# Altium PCB EEM_PWR_MOD_AC.pcbdoc (part 2 of 2)
Units mm, origin at the board's own origin, x right, y up, seen from the top; angles counter-clockwise.
Board outline 177.11 x 100.13 mm, 2 copper layers (Top Layer, Bottom Layer), stack 1.62 mm thick; 73 components, 37 nets, 173 pads, 46 vias.
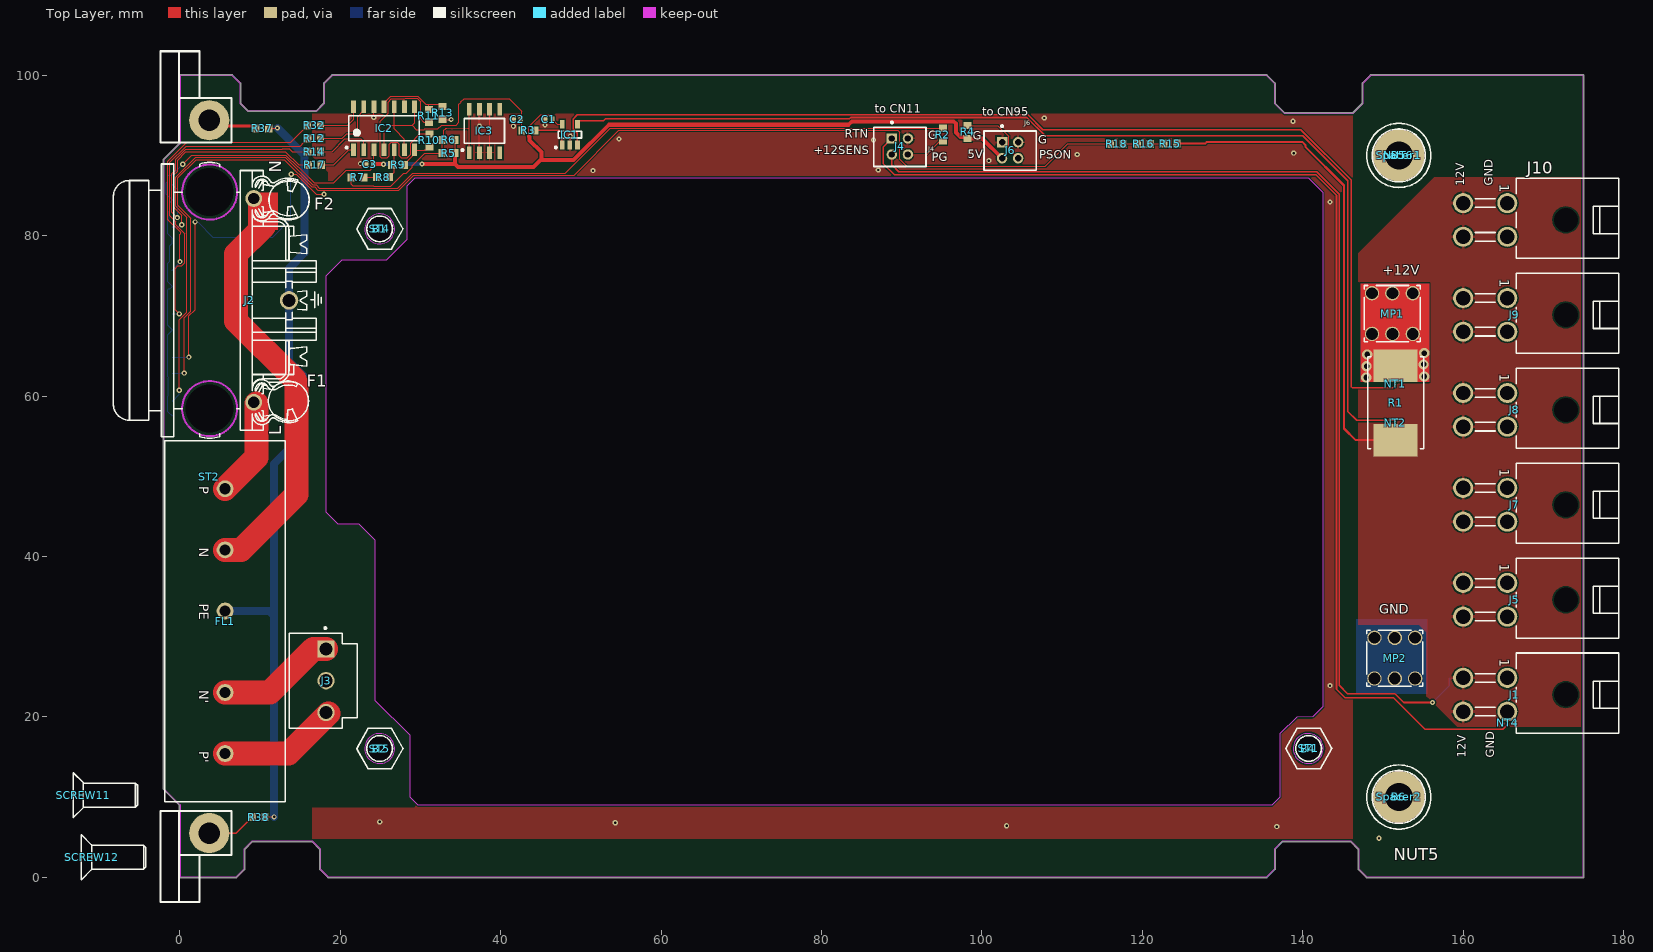
[diagram p0: Top Layer view]

## Keep-outs (continued)
Keep-Out Layer: (continued)
  lines w0.2: -2,11 -2,89.5 0,91.5 0,100 6.5,100 7.5,99 7.5,96.5 8.5,95.5 17,95.5 18,96.5 18,99 19,100 135.5,100 136.5,99 136.5,96.5 137.726,95.274 146.274,95.274 147.5,96.5 147.5,99 148.497,99.997 175,99.997 175,0 148,0 147,1 147,3.5 146,4.5 137.5,4.5 136.5,3.5 136.5,1 135.5,0 18.5,0 17.5,1 17.5,3.5 16.5,4.5 9,4.5 8,3.5 8,1 7,0 0,0 0,9 -2,11
  lines w0.254: 7.135,58.498 ccw(c3.7,58.436) 7.135,58.42 ; 7.135,85.498 ccw(c3.7,85.436) 7.135,85.42

## Other copper
Top Layer:
  rectangle net P12V0_SMPS: 151.498,61.671 151.625,61.825
  rectangle net RTN_Sense: 165.494,19.025 165.621,19.147
  rectangle net Imeas+: 151.498,61.253 151.625,61.493
  rectangle net Imeas-: 151.498,56.857 151.625,56.95
  rectangle net P12V0_SMPS: 147.193,61.747 155.804,74.066
  rectangle net NetFL1_N: 8.458,80.736 12.2,85.379
  pour cut-out: 16.688,89.738 18.491,87.935 18.491,49.987 26.289,42.189 26.289,22.885 30.302,18.872 30.302,9.804 29.185,8.687 0.178,8.687 -2.337,11.201 -2.337,89.408 -2.007,89.738
Bottom Layer:
  rectangle net P12V0: 158.656,24.701 159.002,24.828
  rectangle net P12V0_SMPS: 147.193,61.73 155.804,74.066
  rectangle net GND: 146.66,22.86 155.6,32.182
  pour cut-out: 16.43,33.829 21.602,33.829 23.133,32.298 23.133,17.867 21.926,16.659 14.289,16.659 13.678,17.271 13.678,32.298 13.804,32.298 13.678,32.298
  pour cut-out: 3.5,61.5 4.623,62.623 4.882,62.623 5.596,63.336 11.819,63.336 13.64,61.516 13.64,56.154 11.914,54.428 4.7,54.428 3.346,55.782
  pour cut-out: 2.576,88.835 13.878,88.835 14.554,88.159 14.554,82.123 11.73,79.299 3.649,79.299 2.023,80.925
  pour cut-out: 1.63,53.328 10.073,53.328 10.435,52.966 10.435,38.535 7.841,35.941 2.978,35.941 0.98,37.939 0.98,52.966 1.107,52.966 0.98,52.966
  pour cut-out: 1,27 9.443,27 9.805,26.638 9.805,12.207 8.598,11 0.961,11 0.35,11.611 0.35,26.638 0.476,26.638 0.35,26.638

## Silkscreen, mask and mechanical layers (free items; w line width, h text height)
Top Overlay:
  text "to CN11" at 86.639,94.971 h1.78
  text "to CN95" at 100.076,94.59 h1.78
  text "RTN" at 82.931,91.846 h1.78
  text "G" at 93.294,91.669 h1.78
  text "G" at 98.857,91.592 h1.78
  text "G" at 107.061,91.11 h1.78
  text "+12SENS" at 79.045,89.764 h1.78
  text "5V" at 98.222,89.306 h1.78
  text "PSON" at 107.137,89.205 h1.78
  text "PG" at 93.777,88.9 h1.78
  text "12V  /  / GND" at 164.085,86.258 h1.78 r90
  text "+12V" at 150.012,74.701 h2
  text "GND" at 149.553,32.436 h2
  text "12V  /  / GND" at 164.272,14.919 h1.78 r90
Bottom Paste:
  text ".Layer_Name" at 168.705,-40.005 h1.91
Mechanical 1:
  lines w0.1: 17,95.5 8.5,95.5 7.5,96.5 ; 17.5,96 18,96.5 18,99 19,100 135.5,100 136.5,99 136.5,96.5 137.726,95.274 146.274,95.274 147.5,96.5 147.5,99 148.5,100 160,100 160,100 ; 159.997,99.997 174.997,99.997 ; 175,100 175,0 160,0 148,0 147,1 147,3.5 146,4.5 137.5,4.5 136.5,3.5 136.5,1 135.5,0 18.5,0 17.5,1 17.5,3.5 16.5,4.5 9,4.5 8,3.5 8,1 7,0 0,0 0,9 -2,11 -2,89.5 0,91.5 0,100 6.5,100 7.5,99 7.5,96.5 ; 7.5,96.5 7.5,96.5
  lines w0.127: 7.5,99 6.5,100 0,100 0,91.5 -2,89.5 -2,11 0,9 0,0 7,0 8,1 8,3.5 9,4.5 16.5,4.5 17.5,3.5 17.5,1 18.5,0 135.5,0 136.5,1 136.5,3.5 137.5,4.5 146,4.5 147,3.5 147,1 148,0 160,0 ; 17,95.5 18,96.5 18,99 19,100 135.5,100 136.5,99 136.5,96.5 137.726,95.274 146.274,95.274 147.5,96.5 147.5,99 148.5,100 160,100
  lines w0.254: 134.995,87.2 140.693,87.2 142.5,85.393 142.5,21.25 141.25,20 139.25,20 137.166,17.916 137.166,10 136.166,9 29.701,9 28.701,10 28.701,17.672 24.366,22.008 24.366,42 22.366,44 19.766,44 18.266,45.5 18.266,75 20.266,77 25.78,77 28.366,79.586 28.366,86.2 29.366,87.2 136.166,87.2
Mechanical 2:
  circle w0.006: c10.557,-78.944 r0.003
  circle w0.013: c140.701,80.85 r1.75
  circle w0.013: c24.901,80.85 r1.75
  circle w0.013: c140.701,16.05 r1.75
  circle w0.013: c24.901,16.05 r1.75
  circle w0.013: c155.05,81.07 r0.5
  circle w0.013: c155.05,83.61 r0.5
  circle w0.013: c155.05,78.53 r0.5
  circle w0.013: c152.51,75.99 r0.5
  circle w0.013: c152.51,89.955 r2
  circle w0.013: c152.51,83.61 r0.5
  circle w0.013: c152.51,78.53 r0.5
  circle w0.013: c152.51,81.07 r0.5
  circle w0.013: c155.05,73.45 r0.5
  circle w0.013: c155.05,75.99 r0.5
  circle w0.013: c155.05,68.37 r0.5
  circle w0.013: c155.05,70.91 r0.5
  circle w0.013: c155.05,65.83 r0.5
  circle w0.013: c152.51,73.45 r0.5
  circle w0.013: c155.05,60.11 r0.5
  circle w0.013: c155.05,62.65 r0.5
  circle w0.013: c149.97,81.07 r0.5
  circle w0.013: c149.97,83.61 r0.5
  circle w0.013: c152.51,70.91 r0.5
  circle w0.013: c149.97,78.53 r0.5
  circle w0.013: c149.97,73.45 r0.5
  circle w0.013: c149.97,75.99 r0.5
  circle w0.013: c149.97,68.37 r0.5
  circle w0.013: c149.97,70.91 r0.5
  circle w0.013: c152.51,65.83 r0.5
  circle w0.013: c152.51,68.37 r0.5
  circle w0.013: c152.51,60.11 r0.5
  circle w0.013: c152.51,62.65 r0.5
  circle w0.013: c149.97,62.65 r0.5
  circle w0.013: c149.97,65.83 r0.5
  circle w0.013: c152.51,57.57 r0.5
  circle w0.013: c149.97,60.11 r0.5
  circle w0.013: c155.05,55.03 r0.5
  circle w0.013: c155.05,57.57 r0.5
  circle w0.013: c155.05,49.95 r0.5
  circle w0.013: c155.05,52.49 r0.5
  circle w0.013: c155.05,44.23 r0.5
  circle w0.013: c155.05,46.77 r0.5
  circle w0.013: c155.05,40.42 r0.5
  circle w0.013: c152.51,44.23 r0.5
  circle w0.013: c155.05,34.07 r0.5
  circle w0.013: c155.05,37.88 r0.5
  circle w0.013: c155.05,26.45 r0.5
  circle w0.013: c155.05,31.53 r0.5
  circle w0.013: c155.05,18.83 r0.5
  circle w0.013: c155.05,23.91 r0.5
  circle w0.013: c155.05,16.29 r0.5
  circle w0.013: c152.51,9.945 r2
  circle w0.013: c152.51,37.88 r0.5
  circle w0.013: c152.51,40.42 r0.5
  circle w0.013: c152.51,31.53 r0.5
  circle w0.013: c152.51,34.07 r0.5
  circle w0.013: c152.51,52.49 r0.5
  circle w0.013: c152.51,55.03 r0.5
  circle w0.013: c152.51,46.77 r0.5
  circle w0.013: c152.51,49.95 r0.5
  circle w0.013: c152.51,23.91 r0.5
  circle w0.013: c152.51,26.45 r0.5
  circle w0.013: c152.51,16.29 r0.5
  circle w0.013: c152.51,18.83 r0.5
  circle w0.013: c149.97,23.91 r0.5
  circle w0.013: c149.97,26.45 r0.5
  circle w0.013: c149.97,16.29 r0.5
  circle w0.013: c149.97,18.83 r0.5
  circle w0.013: c147.43,83.61 r0.5
  circle w0.013: c147.43,78.53 r0.5
  circle w0.013: c147.43,81.07 r0.5
  circle w0.013: c147.43,73.45 r0.5
  circle w0.013: c147.43,75.99 r0.5
  circle w0.013: c147.43,68.37 r0.5
  circle w0.013: c147.43,70.91 r0.5
  circle w0.013: c147.43,62.65 r0.5
  circle w0.013: c147.43,65.83 r0.5
  circle w0.013: c149.97,55.03 r0.5
  circle w0.013: c149.97,57.57 r0.5
  circle w0.013: c149.97,49.95 r0.5
  circle w0.013: c149.97,52.49 r0.5
  circle w0.013: c147.43,57.57 r0.5
  circle w0.013: c147.43,60.11 r0.5
  circle w0.013: c147.43,49.95 r0.5
  circle w0.013: c147.43,52.49 r0.5
  circle w0.013: c149.97,44.23 r0.5
  circle w0.013: c149.97,46.77 r0.5
  circle w0.013: c149.97,31.53 r0.5
  circle w0.013: c149.97,40.42 r0.5
  circle w0.013: c147.43,44.23 r0.5
  circle w0.013: c147.43,46.77 r0.5
  circle w0.013: c149.97,34.07 r0.5
  circle w0.013: c149.97,37.88 r0.5
  circle w0.013: c147.43,40.42 r0.5
  circle w0.013: c147.43,55.03 r0.5
  circle w0.013: c147.43,31.53 r0.5
  circle w0.013: c147.43,37.88 r0.5
  circle w0.013: c147.43,34.07 r0.5
  circle w0.013: c147.43,23.91 r0.5
  circle w0.013: c147.43,26.45 r0.5
  circle w0.013: c147.43,16.29 r0.5
  circle w0.013: c147.43,18.83 r0.5
  lines w0.013: 18.243,45.551 19.743,44.051 22.343,44.051 24.343,42.051 24.343,22.058 28.678,17.723 28.678,10.051 29.678,9.051 136.143,9.051 137.143,10.051 137.143,86.251 136.143,87.251 ; 18.243,75.051 20.243,77.051 25.757,77.051 28.343,79.637 28.343,86.251 29.343,87.251
  lines w0.254: -2.53,-11.762 -2.53,114
Mechanical 13:
  text "RPS-400-12 or EPP-400-12" at 67.691,-13.995 h2.54

## Dimensions
0,0 to 3.57,5.55 on Drill Drawing
3.57,5.55 to 0,0 on Drill Drawing

## Text inside footprints (layer, text, board x,y; h text height)
FL1: Top Overlay "P" at 2.425,48.728 h1.2 r270; Top Overlay "N" at 2.425,41.108 h1.2 r270; Top Overlay "PE" at 2.425,34.128 h1.2 r270; Top Overlay "N'" at 2.425,23.328 h1.2 r270; Top Overlay "P'" at 2.425,15.708 h1.2 r270
J1: Top Overlay "1" at 164.572,27.233 h1.2 r270; Mechanical 14 "1" at 164.572,27.233 h1.2 r270
J2: Top Overlay "L" at 12.625,55.139 h1.5 r90; Top Overlay "N" at 12.65,87.836 h1.5 r90; Mechanical 14 "L" at 12.625,55.139 h1.5 r90; Mechanical 14 "N" at 12.65,87.836 h1.5 r90; Notvisible "Must be 2mm" at 9.65,66.861 h1 r90; Notvisible "3D Fuse (5X20) Stand-off Heigh" at 7.675,60.411 h1 r90
J5: Top Overlay "1" at 164.572,39.075 h1.2 r270; Mechanical 14 "1" at 164.572,39.075 h1.2 r270
J7: Top Overlay "1" at 164.572,50.916 h1.2 r270; Mechanical 14 "1" at 164.572,50.916 h1.2 r270
J8: Top Overlay "1" at 164.572,62.758 h1.2 r270; Mechanical 14 "1" at 164.572,62.758 h1.2 r270
J9: Top Overlay "1" at 164.572,74.599 h1.2 r270; Mechanical 14 "1" at 164.572,74.599 h1.2 r270
J10: Top Overlay "1" at 164.572,86.441 h1.2 r270; Mechanical 14 "1" at 164.572,86.441 h1.2 r270